# EAGLE board nanoled 2x mosfet (EAGLE 7.6.0)
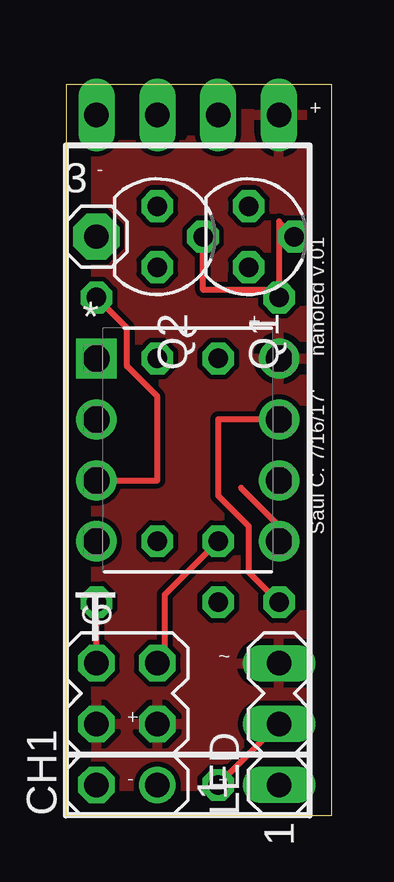
[diagram p0: board, top side]
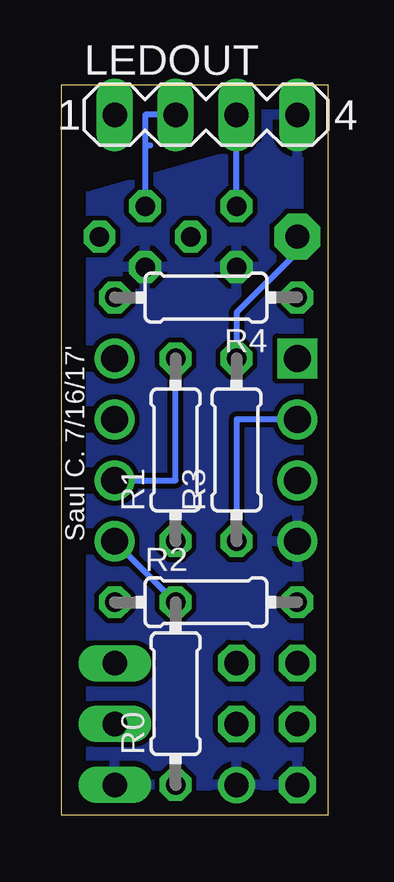
[diagram p1: board, bottom side, seen from below]

Size 11.1 x 30.47 mm. Coordinates in mm from the lower left corner, seen from the top.
Outline: 0,0 11.1,0 11.1,30.47 0,30.47 0,0
Copper layers (1*16): Top 0.035mm / dielectric 1.5mm / Bottom 0.035mm
Design rules "default": minimum track width 10mil, minimum drill 24mil, track to track 8mil, track to pad 8mil, pad to pad 8mil, via to via 8mil, smd to smd 8mil, copper to edge 40mil, drill to drill 8mil, minimum pad ring 10mil, minimum via ring 8mil, stop-mask expansion 4mil, vias tented up to drill 0mil, thermal gap 10mil

## Footprints (pad centres in the part's own frame; a part is rotated, then mirrored left to right if it is on the bottom)
1X01 = drill 1.016 pad 1.93 octagon: 1 0,0
MA03-2 = drill 1.016: 1 -2.54,-1.27 | drill 1.016 octagon: 2 -2.54,1.27; 3 0,-1.27; 4 0,1.27; 5 2.54,-1.27; 6 2.54,1.27
MA03-1 = drill 1.016 long: 1 -2.54,0; 2 0,0; 3 2.54,0
MA04-1 = drill 1.016 long: 1 -3.81,0; 2 -1.27,0; 3 1.27,0; 4 3.81,0
SOT54E = drill 0.813 octagon: D -1.27,0; G 0,1.905; S 1.27,0
0204/7 = drill 0.813 octagon: 1 -3.81,0; 2 3.81,0
DIP254P762X533-8 = drill 1.118 square: 1 -7.62,7.62 | drill 1.118: 2 -7.62,5.08; 3 -7.62,2.54; 4 -7.62,0; 5 0,0; 6 0,2.54; 7 0,5.08; 8 0,7.62

## Placement (x,y rotation side)
3  [1X01]  1.27,24.13 0 top
CH1  [MA03-2]  2.54,3.81 90 top
LED  [MA03-1]  8.89,3.81 90 top
LEDOUT  [MA04-1]  5.08,29.21 0 bottom
Q1  BS170  [SOT54E]  7.62,24.13 270 top
Q2  BS170  [SOT54E]  3.81,24.13 270 top
R0  220  [0204/7]  6.35,5.08 90 bottom
R1  10k  [0204/7]  6.35,15.24 90 bottom
R2  220  [0204/7]  5.08,8.89 0 bottom
R3  [0204/7]  3.81,15.24 90 bottom
R4  [0204/7]  5.08,21.59 180 bottom
T  ATTINY85-20PU  [DIP254P762X533-8]  8.89,11.43 0 top

## Library data of the parts
3 = adafruit
CH1 LED LEDOUT = con-lstb; OC_FARNELL: unknown; OC_NEWARK: unknown
Q1 Q2 = transistor-small-signal
R0 R1-R4 = resistor
T = Atmel_By_element14_Batch_1-00; MPN: ATTINY85-20PU; OC_FARNELL: 1455162; OC_NEWARK: 58M3796; PACKAGE: PDIP-8; SUPPLIER: Atmel

## Nets
3OUT: 3.1 R3.2
4OUT: Q1.G Q2.G R4.2
GND: CH1.1 CH1.2 LED.1 LEDOUT.4 Q1.S Q2.S T.4
LED0: LEDOUT.2 Q1.D
LED1: LEDOUT.3 Q2.D
N$1: LED.2 R0.1
N$2: CH1.5 R1.1
N$4: CH1.6 R2.2
P0: R0.2 T.5
P1: R1.2 T.6
P2: R2.1 T.7
P3: R3.1 T.2
P4: R4.1 T.3
RST: T.1
VCC: CH1.3 CH1.4 LED.3 LEDOUT.1 T.8

## Tracks (layer width: path | path; a pad name or v marks a point on that pad's centre or on a via)
3OUT
  Bottom 0.254: R3.2 3.81,20.95 1.27,23.5 3.1
4OUT
  Top 0.254: 8.89,21.91 8.89,24.77 Q1.G | Q2.G 5.71,21.91 8.89,21.91 | 8.89,21.91 R4.2
GND
  pour Bottom: 0,30.48 0,-1.27 11.43,-1.27 11.43,25.4 2.54,27.94 2.54,30.48
JJ
  Bottom 0.254: 7.62,27.94 7.4,27.94
LED0
  Bottom 0.254: LEDOUT.2 7.62,29.21 Q1.D
LED1
  Bottom 0.254: Q2.D LEDOUT.3
N$1
  Top 0.254: LED.2 R0.1
N$2
  Top 0.254: R1.1 4.13,9.21 4.13,6.35 CH1.5
N$4
  Top 0.254: CH1.6 R2.2
P0
  Top 0.254: 7.3,13.65 8.89,12.06 T.5
  Bottom 0.254: T.5 R0.2
P1
  Bottom 0.254: R1.2 6.35,13.97 T.6
P2
  Top 0.254: R2.1 7.62,10.16 7.62,12.06 6.35,13.34 6.35,16.51 T.7
P3
  Bottom 0.254: R3.1 3.81,16.51 T.2
P4
  Top 0.254: R4.1 2.54,20.32 2.54,18.73 3.81,17.46 3.81,13.97 T.3
VCC
  pour Top: 0,0 11.43,0 11.43,30.48 6.35,30.48 5.08,27.94 0,27.94

## Text on the board
tPlace: + | - | nanoled v.01 | + | Saul C. 7/16/17' | ~ | + | - | -
bPlace: Saul C. 7/16/17'